# EAGLE board CancelloWIFI (EAGLE 9.5.2)
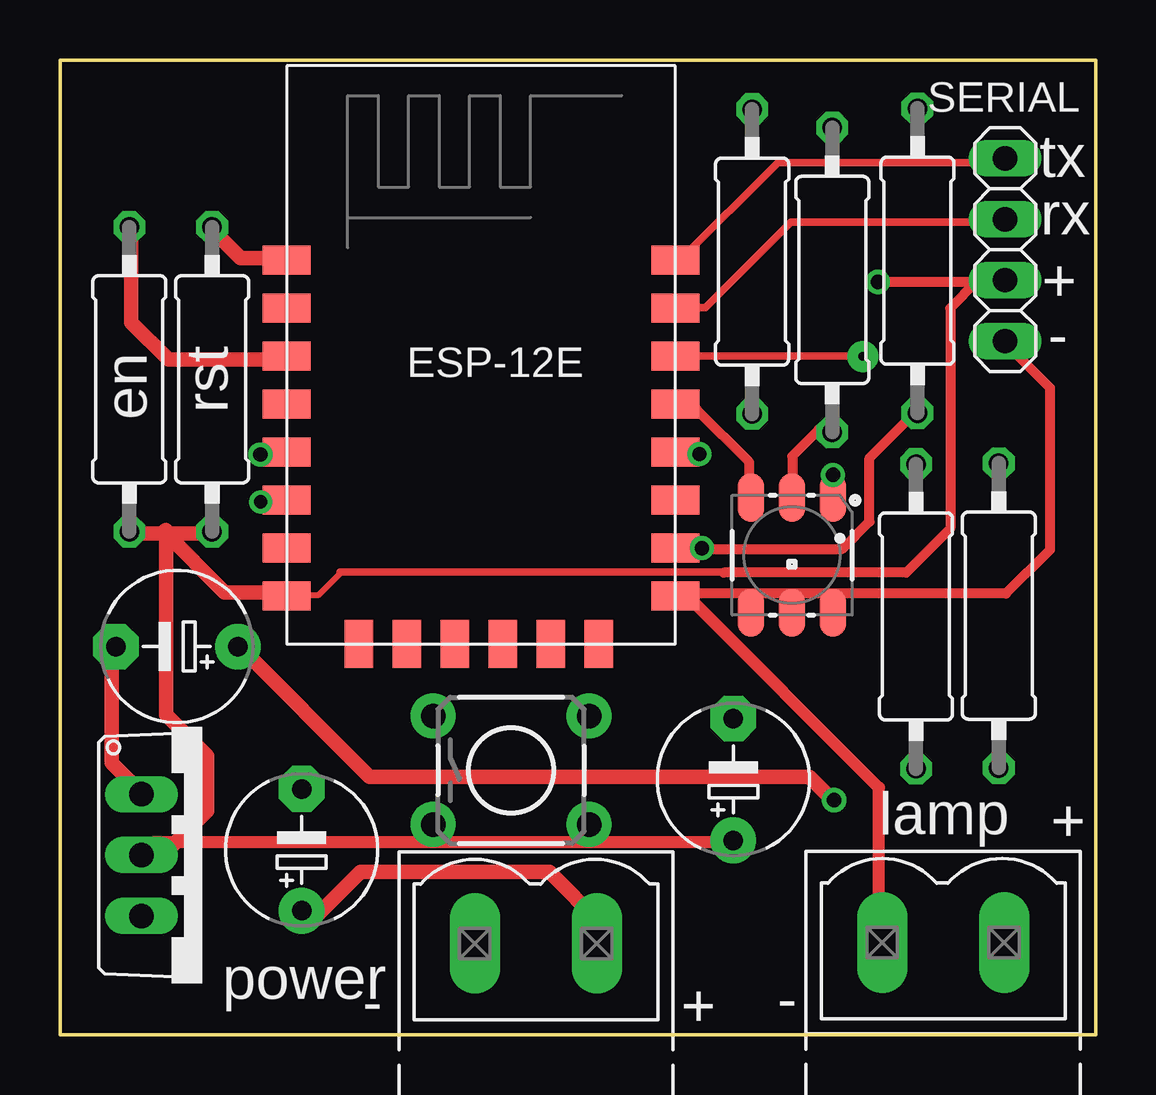
[diagram p0: board, top side]
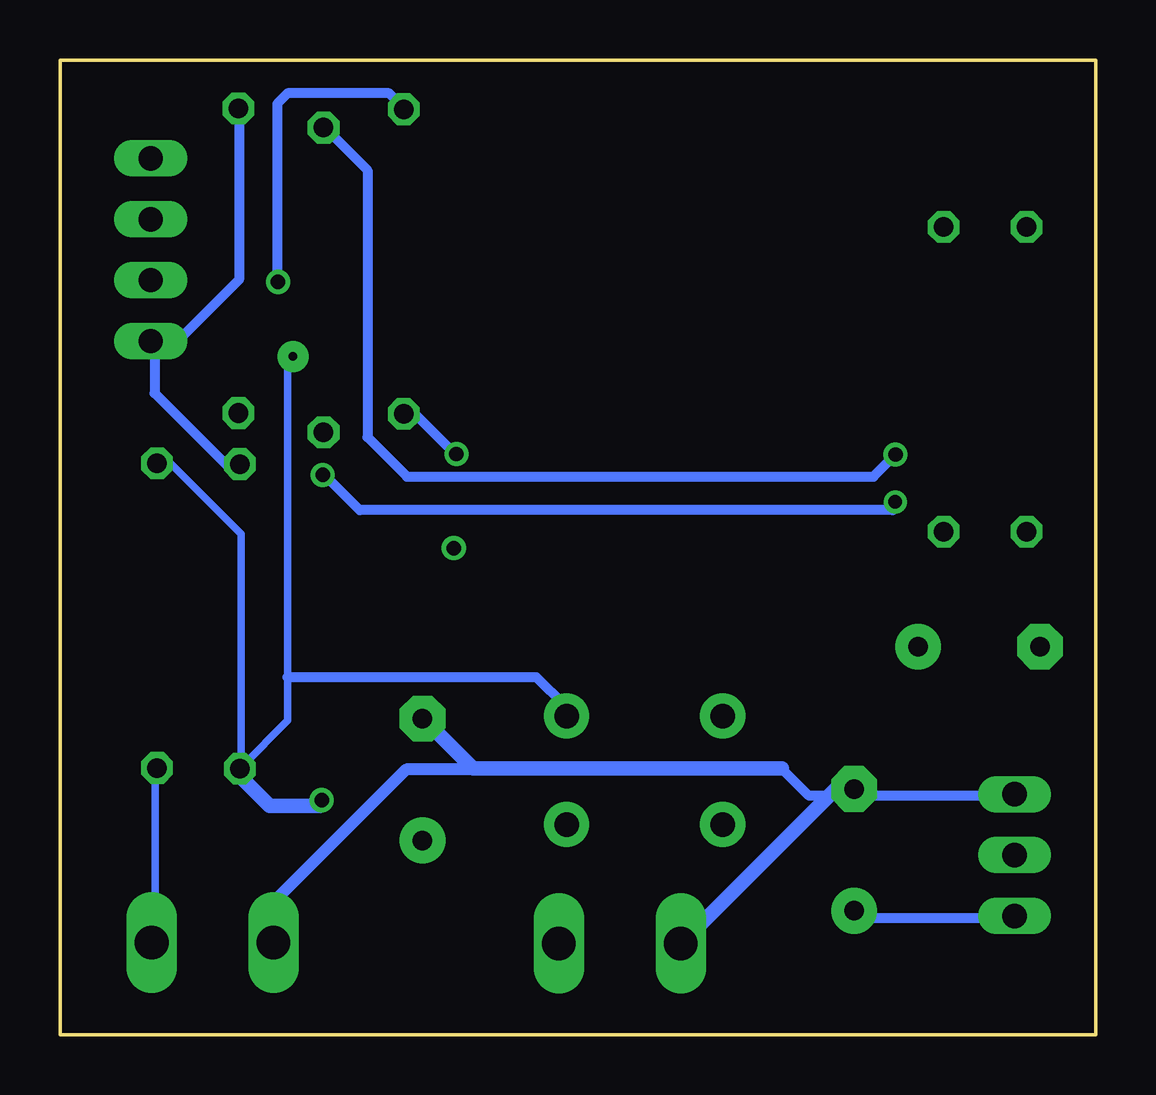
[diagram p1: board, bottom side, seen from below]

Size 43.18 x 40.64 mm. Coordinates in mm from the lower left corner, seen from the top.
Outline: 0,0 0,40.64 43.18,40.64 43.18,0 0,0
Copper layers (1*16): Top 0.035mm / dielectric 1.5mm / Bottom 0.035mm
Design rules "default": minimum track width 6mil, minimum drill 0.35mm, track to track 6mil, track to pad 6mil, pad to pad 6mil, via to via 6mil, smd to smd 6mil, copper to edge 40mil, drill to drill 6mil, minimum pad ring 10mil, minimum via ring 8mil, stop-mask expansion 4mil, vias tented up to drill 0mil, thermal gap 10mil

## Footprints (pad centres in the part's own frame; a part is rotated, then mirrored left to right if it is on the bottom)
ESP8266-ESP12E = smd 2 x 1.2: 1 -7.62,5.84; 2 -7.62,3.84; 3 -7.62,1.84; 4 -7.62,-0.16; 5 -7.62,-2.16; 6 -7.62,-4.16; 7 -7.62,-6.16; 8 -7.62,-8.16; 9 8.58,-8.16; 10 8.58,-6.16; 11 8.58,-4.16; 12 8.58,-2.16; 13 8.58,-0.16; 14 8.58,1.84; 15 8.58,3.84; 16 8.58,5.84 | smd 1.2 x 2: 17 -4.62,-10.16; 18 -2.62,-10.16; 19 -0.62,-10.16; 20 1.38,-10.16; 21 3.38,-10.16; 22 5.38,-10.16
0309/12 = drill 0.813 octagon: 1 -6.35,0; 2 6.35,0
LED-TRICOLOR-5050 = smd 2 x 1.1: 1 -2.4,1.7; 2 -2.4,0; 3 -2.4,-1.7; 4 2.4,-1.7; 5 2.4,0; 6 2.4,1.7
E5-6 = drill 0.813 pad 1.905: + -2.54,0 | drill 0.813 pad 1.905 octagon: - 2.54,0
MSTBV2R = drill 1.397 long: 1 -2.54,0; 2 2.54,0
TACTILE_SWITCH_PTH_6.0MM = drill 1.016 pad 1.88: 1 -3.251,2.261; 2 3.251,2.261; 3 -3.251,-2.261; 4 3.251,-2.261
TO220AV = drill 1.016 long: 1 -2.54,-2.54; 2 0,-2.54; 3 2.54,-2.54
1X04 = drill 1.016 long: 1 -3.81,0; 2 -1.27,0; 3 1.27,0; 4 3.81,0

## Placement (x,y rotation side)
E$1  [ESP8266-ESP12E]  17.07,26.46 0 top
E$2  [0309/12]  2.89,27.33 90 top
E$3  [0309/12]  35.68,17.44 90 top
E$4  [0309/12]  39.13,17.48 90 top
E$5  [LED-TRICOLOR-5050]  30.51,20 270 top
E$6  [E5-6]  28.07,10.65 90 top
E$7  [0309/12]  6.34,27.33 90 top
E$8  [MSTBV2R]  36.82,3.85 0 top
E$9  [MSTBV2R]  19.84,3.81 0 top
E$10  [E5-6]  10.08,7.71 90 top
E$11  [0309/12]  35.74,32.27 90 top
E$12  [0309/12]  32.19,31.47 90 top
E$13  [0309/12]  28.85,32.23 90 top
E$14  [TACTILE_SWITCH_PTH_6.0MM]  18.81,11.03 0 top
E$15  [E5-6]  4.87,16.19 180 top
IC1  [TO220AV]  5.93,7.49 270 top
SERIAL  [1X04]  39.4,32.73 90 top

## Library data of the parts
E$1 = esp12e
E$2-E$4 E$7 E$11-E$13 = resistor
E$5 = SparkFun-LED
E$6 E$10 E$15 = adafruit
E$8 E$9 = con-phoenix-500
E$14 = SparkFun-Switches
IC1 = transistor
SERIAL = pinhead

## Tracks (layer width: path | path; a pad name or v marks a point on that pad's centre or on a via)
S$1
  Top 0.254: 11.75,19.32 10.75,18.32 9.68,18.32 9.5,18.14
S$2
  Top 0.305: 25.83,32.27 29.92,36.36 39.43,36.36
S$3
  Top 0.305: 39.42,33.87 30.47,33.87 26.91,30.31 26.04,30.31 25.83,30.11
S$4
  Top 0.406: 39.28,28.96 41.26,26.98 41.26,20.22 39.43,18.39 25.7,18.39
S$5
  Top 0.305: 28.27,19.3 11.68,19.3
S$6
  Top 0.305: 26.04,28.3 33.38,28.3 33.38,28.31
S$7  (via drill 0.35 pad 1.3)
  other vias: 33.46,28.28
S$8
  Bottom 0.305: 33.48,28.27 33.69,28.06 33.69,13.1 35.6,11.19
S$9
  Bottom 0.305: 38.88,24.14 35.62,20.87 35.62,11.18
S$10
  Bottom 0.305: 39.21,11.54 39.21,4.48 39.95,3.75
S$11
  Top 0.508: 34.08,4.95 34.14,5.01 34.14,10.3 26.22,18.23
S$12
  Top 0.61: 2.16,16.3 2.16,11.35 3.41,10.1
S$13
  Top 0.305: 9.61,18.14 9.79,18.32
S$14
  Bottom 0.508: 25.65,11.06 28.74,11.06 34.58,5.23 34.58,4.58
S$15
  Top 0.508: 3.92,8.04 28.19,8.04
S$17
  Top 0.61: 2.9,20.83 2.97,20.9 6.5,20.9
S$18
  Top 0.61: 4.42,21.05 4.34,20.98 6.87,18.45 9.72,18.45
S$19
  Top 0.61: 2.97,33.67 2.97,29.7 4.53,28.14 9.65,28.14
S$20
  Top 0.61: 9.36,32.37 7.54,32.37 6.39,33.52
S$21
  Bottom 0.61: 13.09,11.12 25.96,11.12 27.93,13.09
S$22
  Bottom 0.61: 17.47,3.62 10.83,10.26
S$23
  Top 0.61: 10.69,4.96 12.53,6.8 20.4,6.8 22.56,4.64 22.56,3.39
S$24
  Top 0.406: 39.21,31.39 38.2,31.39 37.1,30.3 37.1,21.1 35.28,19.27 27.67,19.27
S$25
  Bottom 0.406: 39.23,28.96 39.23,26.75 36.12,23.64
S$26
  Top 0.406: 28.74,22.43 28.74,23.88 26.54,26.07 25.68,26.07 25.66,26.05
S$27  (via drill 0.6 pad 0.9)
  other vias: 26.76,20.29
S$28
  Bottom 0.406: 32.15,37.83 30.36,36.04 30.36,24.92 28.72,23.27 9.31,23.27
S$29  (via drill 0.6 pad 0.9)
  other vias: 8.35,24.19
S$30  (via drill 0.6 pad 0.9)
  other vias: 32.23,23.34
S$31  (via drill 0.55 pad 0.9)
  other vias: 8.37,22.22
S$32
  Bottom 0.406: 8.47,21.87 30.69,21.87 31.96,23.14
S$33
  Bottom 0.406: 35.72,38.66 35.72,31.48 38.4,28.79 38.49,28.88 39.41,28.88
S$34
  Top 0.406: 32.46,25.23 31.63,25.23 30.52,24.13 30.52,22.34
S$35
  Top 0.406: 26.96,20.26 32.61,20.26 33.74,21.39 33.74,24.05 35.76,26.07
S$36
  Bottom 0.406: 9.27,23.27 8.36,24.19 8.31,24.19
S$37
  Top 0.406: 38.34,31.39 34.09,31.39 34.06,31.42
S$38
  Bottom 0.406: 22.11,13.71 23.32,14.91 33.7,14.91
S$39
  Bottom 0.406: 3.66,9.96 11.96,9.96 13.07,11.07
S$40
  Top 0.61: 4.43,20.91 4.43,13.33 6.13,11.64 6.13,9.34 4.3,7.51
S$41
  Top 0.61: 7.42,16.25 12.91,10.75 31.24,10.75 31.97,10.03
S$42  (via drill 0.6 pad 0.9)
  other vias: 32.27,9.78
S$43
  Bottom 0.61: 35.87,10.96 34.45,9.54 32.34,9.54
S$45
  Top 0.305: 3.42,20.92 2.89,20.92
S$46  (via drill 0.6 pad 0.9)
  other vias: 34.09,31.39
S$47
  Bottom 0.406: 28.71,38.51 29.45,39.25 33.69,39.25 34.12,38.81 34.12,31.51
S$48  (via drill 0.6 pad 0.9)
  other vias: 26.65,24.21
S$49
  Bottom 0.406: 26.73,24.24 28.44,25.94 28.77,25.94
S$220
  Bottom 0.406: 3.99,4.86 10.4,4.86 10.44,4.82

## Text on the board
tNames: tx | rx | + | en | - | rst | lamp | + | power | - | - | +